# EAGLE board LCD_16x2_with_8051 (EAGLE 9.6.2)
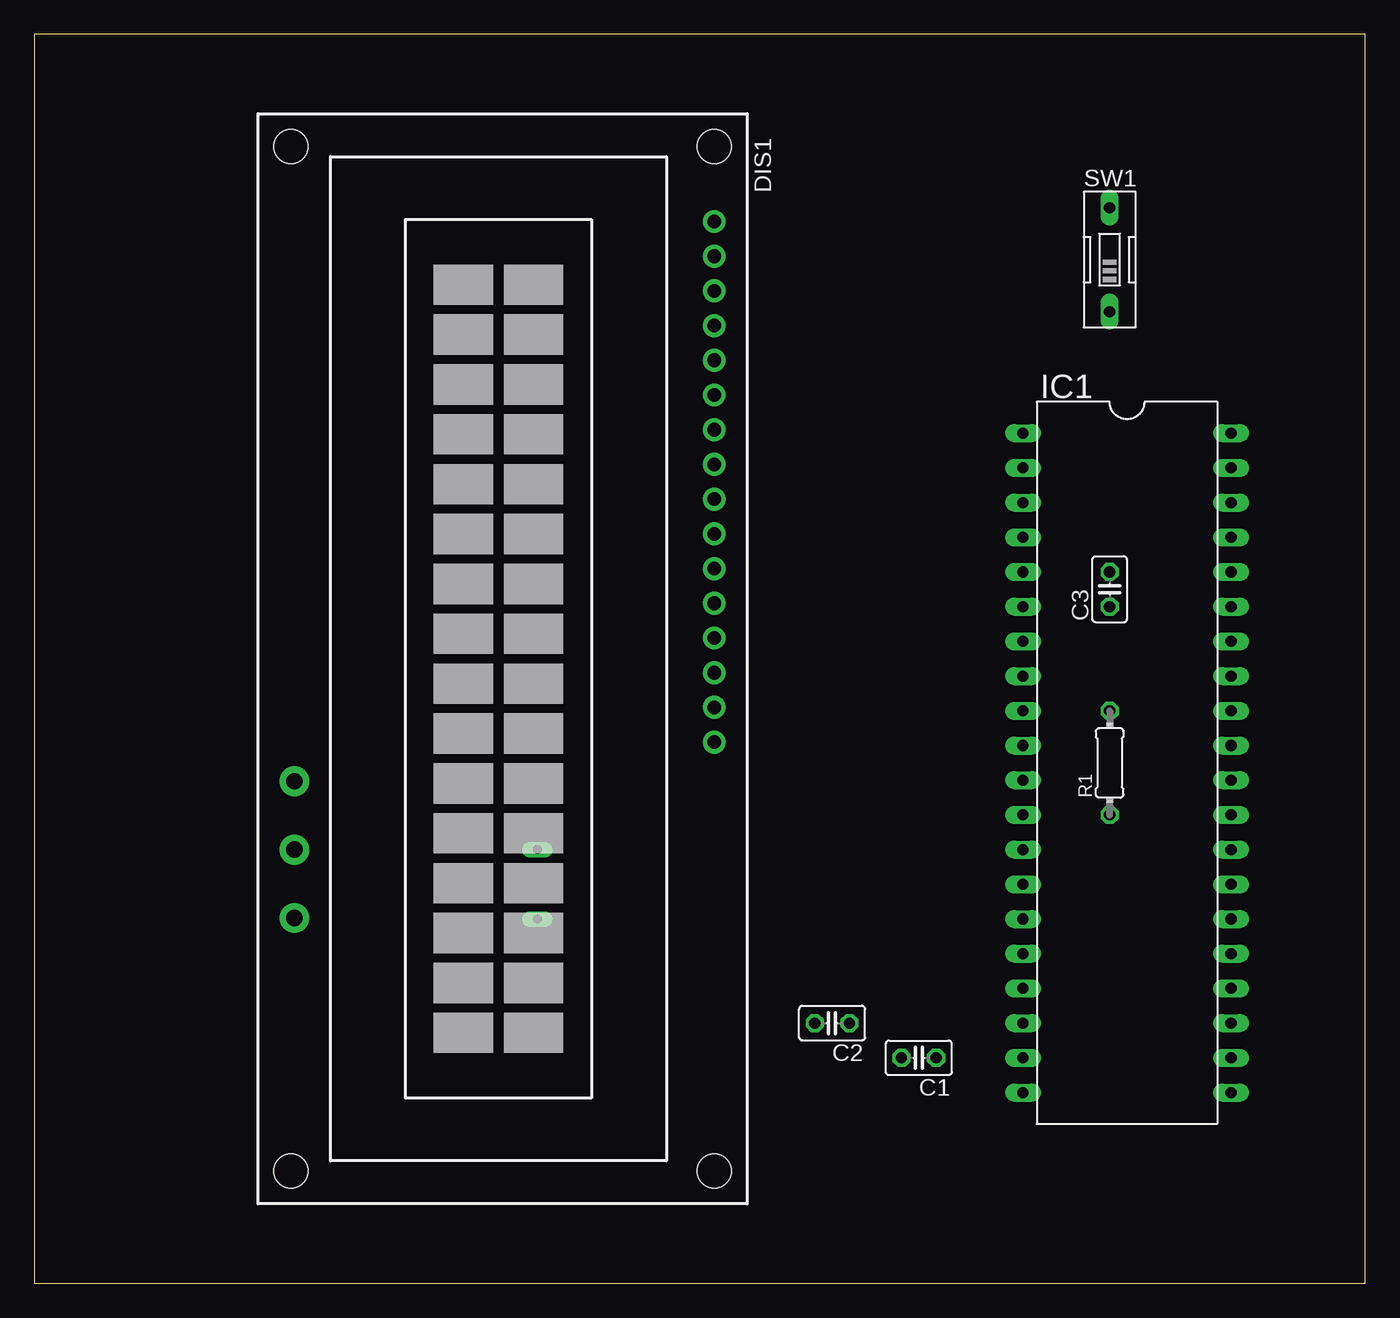
[diagram p0: board, top side]
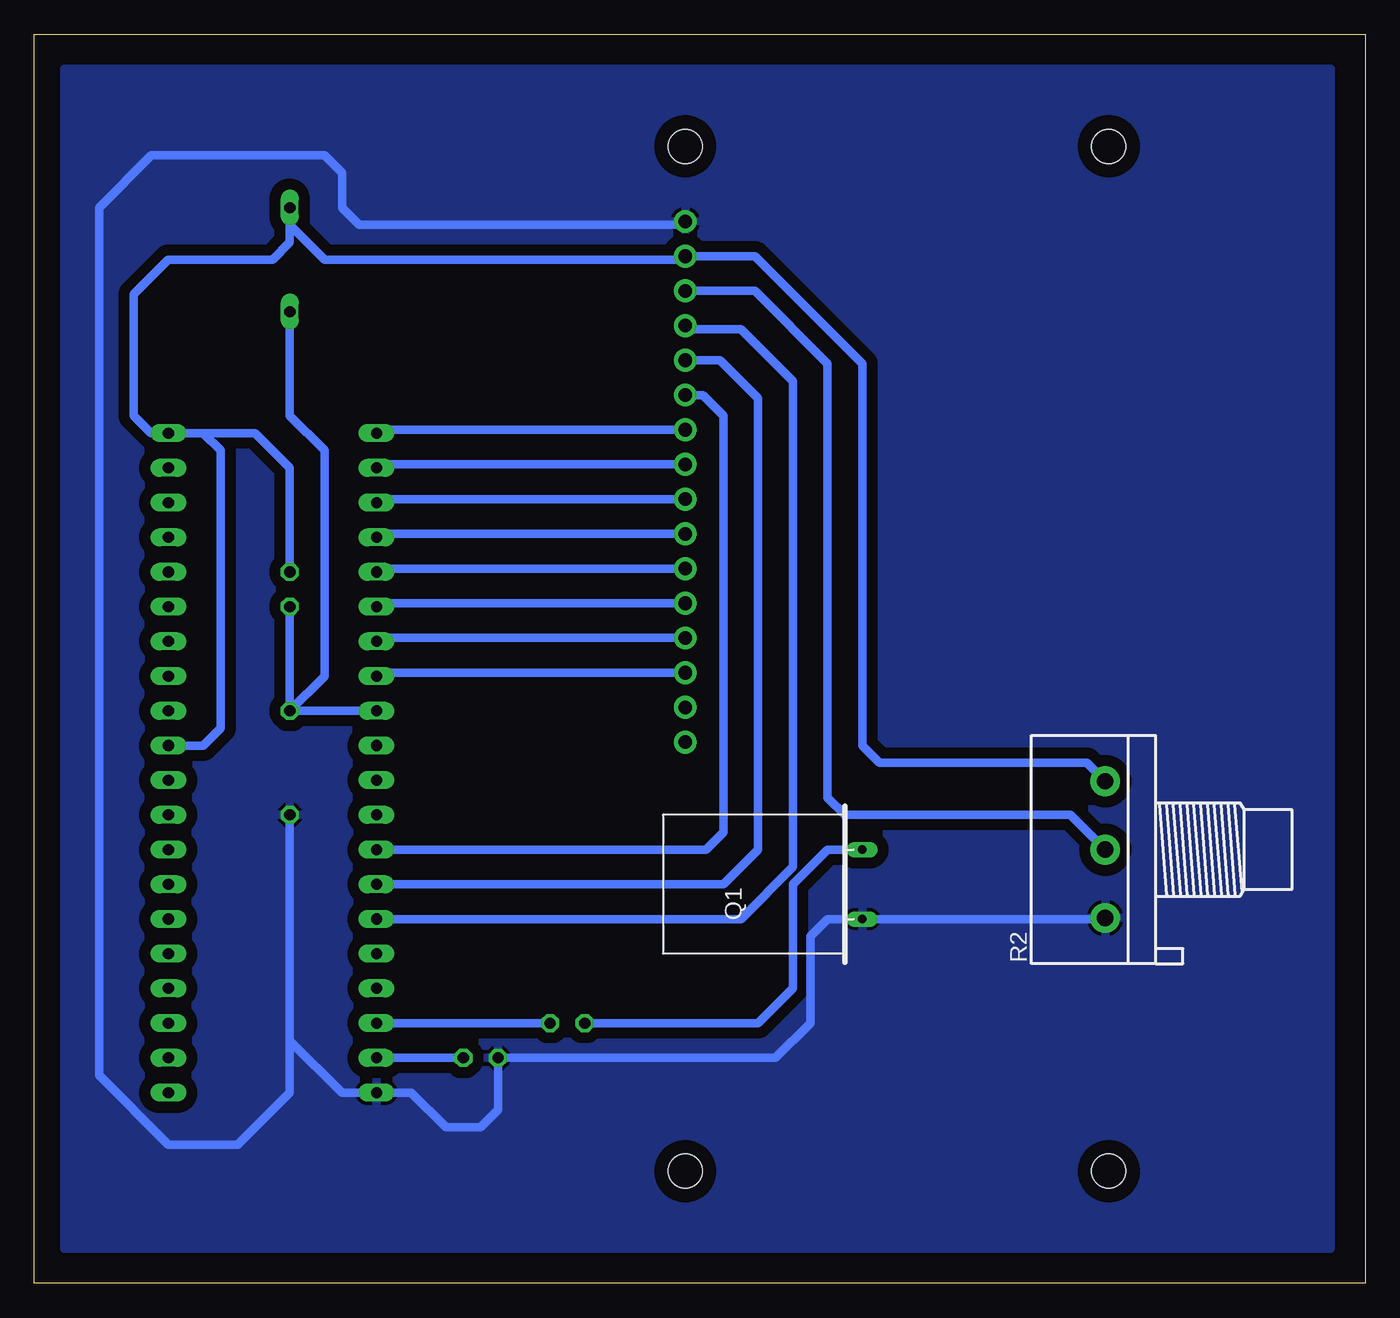
[diagram p1: board, bottom side, seen from below]

Size 97.46 x 91.43 mm. Coordinates in mm from the lower left corner, seen from the top.
Outline: 0,0 97.46,0 97.46,91.43 0,91.43 0,0
Copper layers (1*16): Top 0.035mm / dielectric 1.5mm / Bottom 0.035mm
Design rules "default": minimum track width 6mil, minimum drill 0.35mm, track to track 6mil, track to pad 6mil, pad to pad 6mil, via to via 6mil, smd to smd 6mil, copper to edge 40mil, drill to drill 6mil, minimum pad ring 10mil, minimum via ring 8mil, stop-mask expansion 4mil, vias tented up to drill 0mil, thermal gap 10mil

## Footprints (pad centres in the part's own frame; a part is rotated, then mirrored left to right if it is on the bottom)
C025-025X050 = drill 0.813 octagon: 1 -1.27,0; 2 1.27,0
TUXGR_16X2_R2 = drill 1 pad 1.676: 1 -32,15.5; 2 -29.46,15.5; 3 -26.92,15.5; 4 -24.38,15.5; 5 -21.84,15.5; 6 -19.3,15.5; 7 -16.76,15.5; 8 -14.22,15.5; 9 -11.68,15.5; 10 -9.14,15.5; 11 -6.6,15.5; 12 -4.06,15.5; 13 -1.52,15.5; 14 1.02,15.5; 15 3.56,15.5; 16 6.1,15.5 | hole 2.5: -37.5,-15.5; 37.5,-15.5; -37.5,15.5; 37.5,15.5
DIL40 = drill 0.813 long: 1 -24.13,-7.62; 2 -21.59,-7.62; 3 -19.05,-7.62; 4 -16.51,-7.62; 5 -13.97,-7.62; 6 -11.43,-7.62; 7 -8.89,-7.62; 8 -6.35,-7.62; 9 -3.81,-7.62; 10 -1.27,-7.62; 11 1.27,-7.62; 12 3.81,-7.62; 13 6.35,-7.62; 14 8.89,-7.62; 15 11.43,-7.62; 16 13.97,-7.62; 17 16.51,-7.62; 18 19.05,-7.62; 19 21.59,-7.62; 20 24.13,-7.62; 21 24.13,7.62; 22 21.59,7.62; 23 19.05,7.62; 24 16.51,7.62; 25 13.97,7.62; 26 11.43,7.62; 27 8.89,7.62; 28 6.35,7.62; 29 3.81,7.62; 30 1.27,7.62; 31 -1.27,7.62; 32 -3.81,7.62; 33 -6.35,7.62; 34 -8.89,7.62; 35 -11.43,7.62; 36 -13.97,7.62; 37 -16.51,7.62; 38 -19.05,7.62; 39 -21.59,7.62; 40 -24.13,7.62
Q = drill 0.61 long: 1 -2.54,-7.62; 2 2.54,-7.62
0204/7 = drill 0.813 octagon: 1 -3.81,0; 2 3.81,0
3RP/1610N = drill 1.2 pad 2.184: 1 -5,0; 2 0,0; 3 5,0
EDG-01 = drill 0.813 long: 1 0,-3.81; 2 0,3.81

## Placement (x,y rotation side)
C1  33pF  [C025-025X050]  64.77,16.51 180 top
C2  33pF  [C025-025X050]  58.42,19.05 180 top
C3  10uF  [C025-025X050]  78.74,50.8 90 top
DIS1  TUXGR_16X2_R2  [TUXGR_16X2_R2]  34.29,45.72 270 top
IC1  AT89C51-12PC  [DIL40]  80.01,38.1 270 top
Q1  [Q]  44.45,29.21 90 bottom
R1  8.2K  [0204/7]  78.74,38.1 90 top
R2  10K  [3RP/1610N]  19.05,31.75 90 bottom
SW1  [EDG-01]  78.74,74.93 0 top

## Library data of the parts
C1-C3 = rcl; SPICEPREFIX: C
DIS1 = display-lcd; OC_FARNELL: unknown; OC_NEWARK: unknown
IC1 = atmel; OC_FARNELL: unknown; OC_NEWARK: unknown
Q1 SW1 = special
R1 = rcl; SPICEPREFIX: R
R2 = pot

## Nets
GND: C1.2 DIS1.1 IC1.20 Q1.1 R1.1 R2.1
N$1: DIS1.7 IC1.1
N$2: DIS1.8 IC1.2
N$3: DIS1.9 IC1.3
N$5: DIS1.10 IC1.4
N$6: DIS1.11 IC1.5
N$7: DIS1.12 IC1.6
N$8: DIS1.13 IC1.7
N$9: DIS1.14 IC1.8
N$10: DIS1.6 IC1.13
N$11: DIS1.5 IC1.14
N$12: DIS1.4 IC1.15
N$13: DIS1.3 R2.2
N$15: C3.1 IC1.9 R1.2 SW1.1
N$16: C2.1 IC1.18
N$18: C1.1 IC1.19
N$19: C2.2 Q1.2
VCC: C3.2 DIS1.2 IC1.31 IC1.40 R2.3 SW1.2

## Tracks (layer width: path | path; a pad name or v marks a point on that pad's centre or on a via)
GND
  Bottom 0.61: R2.1 19.13,26.67 Q1.1 39.37,26.67 40.64,25.4 40.64,19.05 43.18,16.51 C1.2 63.5,12.7 64.77,11.43 67.31,11.43 69.85,13.97 IC1.20 74.93,13.97 78.74,17.78 R1.1 78.74,13.97 82.55,10.16 87.63,10.16 92.71,15.24 92.71,78.74 88.9,82.55 76.2,82.55 74.93,81.28 74.93,78.74 73.66,77.47 50.04,77.47 DIS1.1
  pour Bottom (isolate 0.813): 6.35,88.9 95.25,88.9 95.25,2.54 2.54,2.54 2.54,88.9
N$1
  Bottom 0.61: DIS1.7 72.14,62.48 IC1.1
N$2
  Bottom 0.61: DIS1.8 72.14,59.94 IC1.2
N$3
  Bottom 0.61: DIS1.9 72.14,57.4 IC1.3
N$5
  Bottom 0.61: DIS1.10 72.14,54.86 IC1.4
N$6
  Bottom 0.61: DIS1.11 72.14,52.32 IC1.5
N$7
  Bottom 0.61: DIS1.12 72.14,49.78 IC1.6
N$8
  Bottom 0.61: DIS1.13 72.14,47.24 IC1.7
N$9
  Bottom 0.61: DIS1.14 72.14,44.7 IC1.8
N$10
  Bottom 0.61: IC1.13 48.26,31.75 46.99,33.02 46.99,63.5 48.51,65.02 DIS1.6
N$11
  Bottom 0.61: IC1.14 46.99,29.21 44.45,31.75 44.45,64.77 47.24,67.56 DIS1.5
N$12
  Bottom 0.61: IC1.15 45.72,26.67 41.91,30.48 41.91,66.04 45.72,69.85 49.54,69.85 DIS1.4
N$13
  Bottom 0.61: R2.2 21.59,34.29 38.1,34.29 39.37,35.56 39.37,67.31 44.7,72.64 DIS1.3
N$15
  Bottom 0.61: IC1.9 R1.2 | R1.2 C3.1 | SW1.1 78.74,63.5 76.2,60.96 76.2,44.45 R1.2
N$16
  Bottom 0.61: IC1.18 C2.1
N$18
  Bottom 0.61: IC1.19 C1.1
N$19
  Bottom 0.61: C2.2 44.45,19.05 41.91,21.59 41.91,29.21 39.37,31.75 Q1.2
VCC
  Bottom 0.61: IC1.31 85.09,39.37 83.82,40.64 83.82,60.96 85.09,62.23 IC1.40 | IC1.40 81.28,62.23 78.74,59.69 C3.2 | IC1.40 88.9,62.23 90.17,63.5 90.17,72.39 87.63,74.93 80.01,74.93 78.74,76.2 SW1.2 78.74,77.47 76.2,74.93 50.04,74.93 DIS1.2 44.7,75.18 36.83,67.31 36.83,39.37 35.56,38.1 20.4,38.1 R2.3